# Altium PCB VINYL-Player(1).PcbDoc
Units mm, origin at the board's own origin, x right, y up, seen from the top; angles counter-clockwise.
Board outline 152.4 x 101.6 mm, 18 copper layers (F.Cu, F.Mask, B.Cu, B.Mask, F.SilkS, B.SilkS, F.Adhes, B.Adhes, F.Paste, B.Paste, Dwgs.User, Cmts.User, Eco1.User, Eco2.User, Edge.Cuts, Margin, B.CrtYd, F.CrtYd); 26 components, 0 nets, 136 pads, 10 vias.
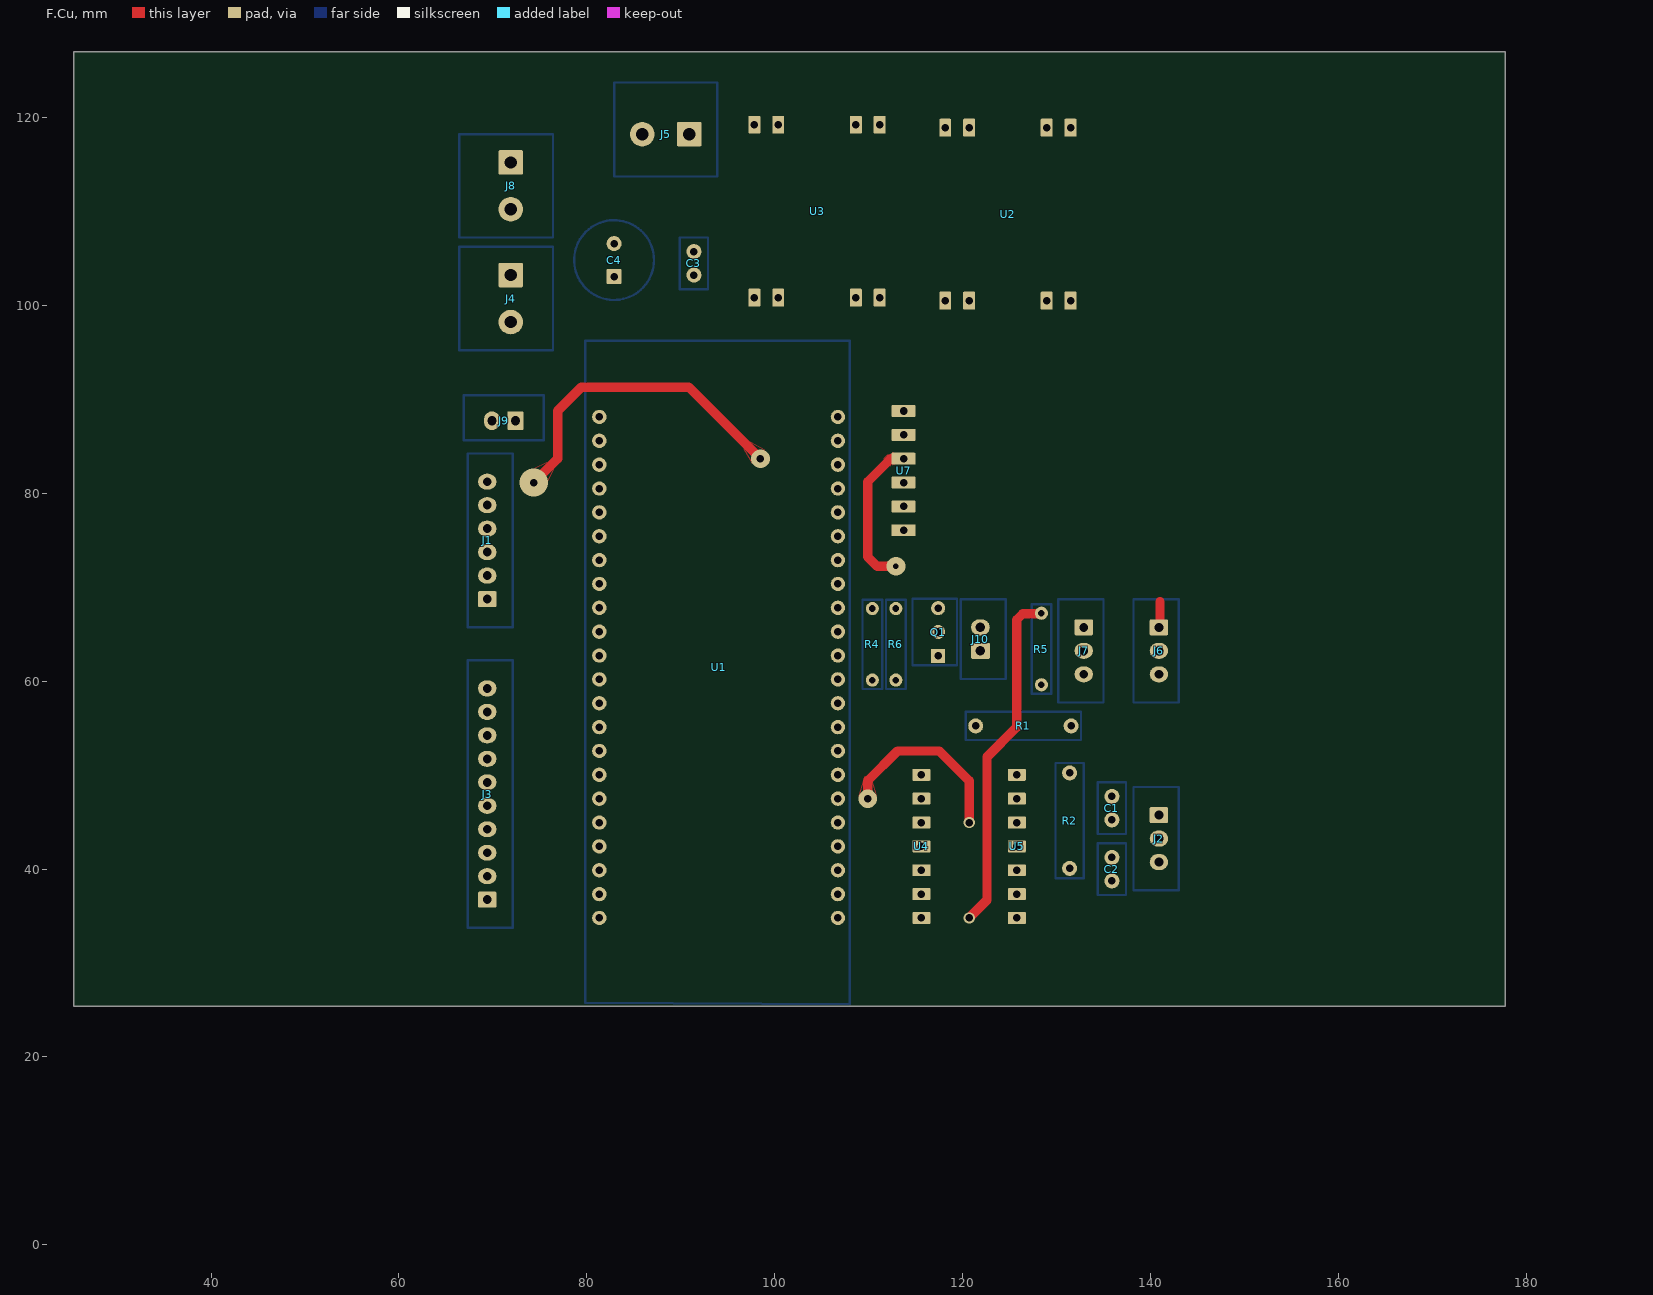
[diagram p0: F.Cu view]
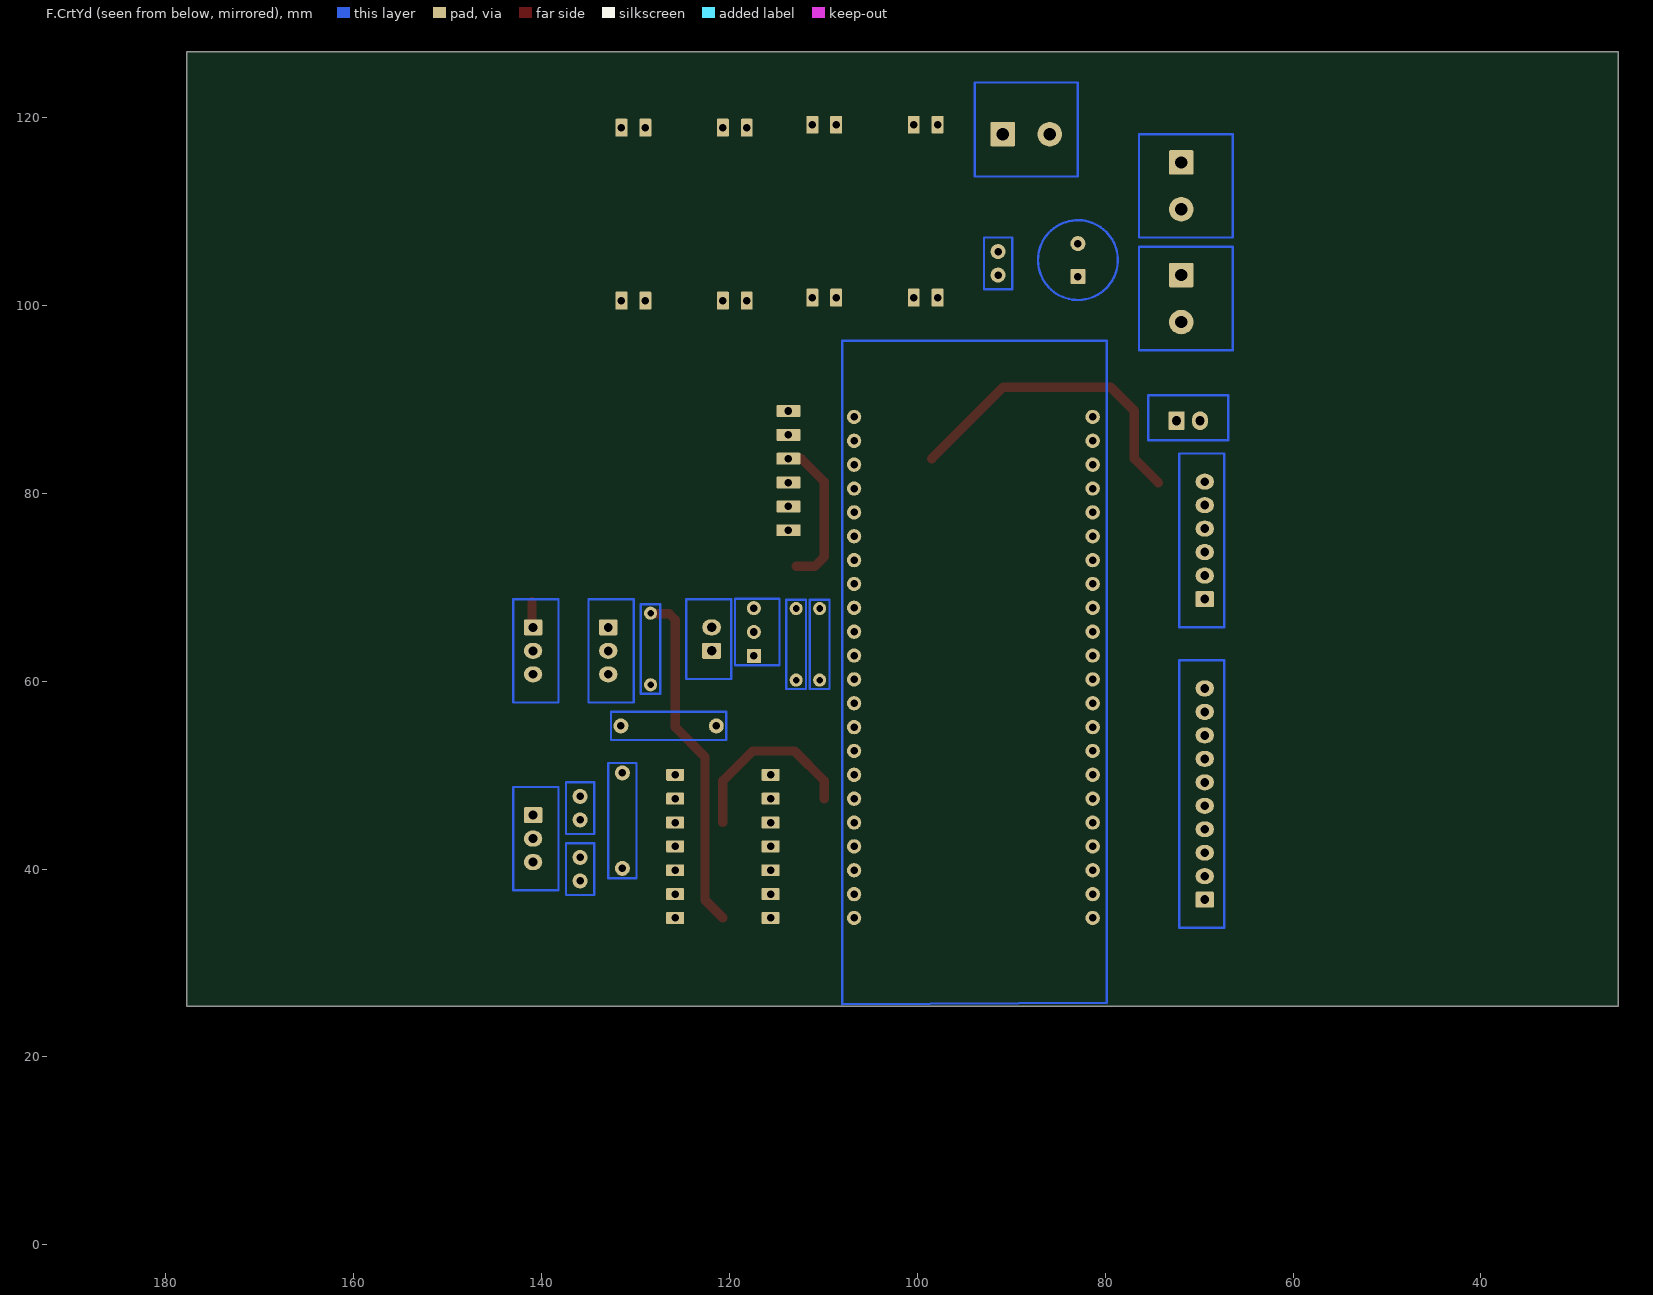
[diagram p1: F.CrtYd view, seen from below]
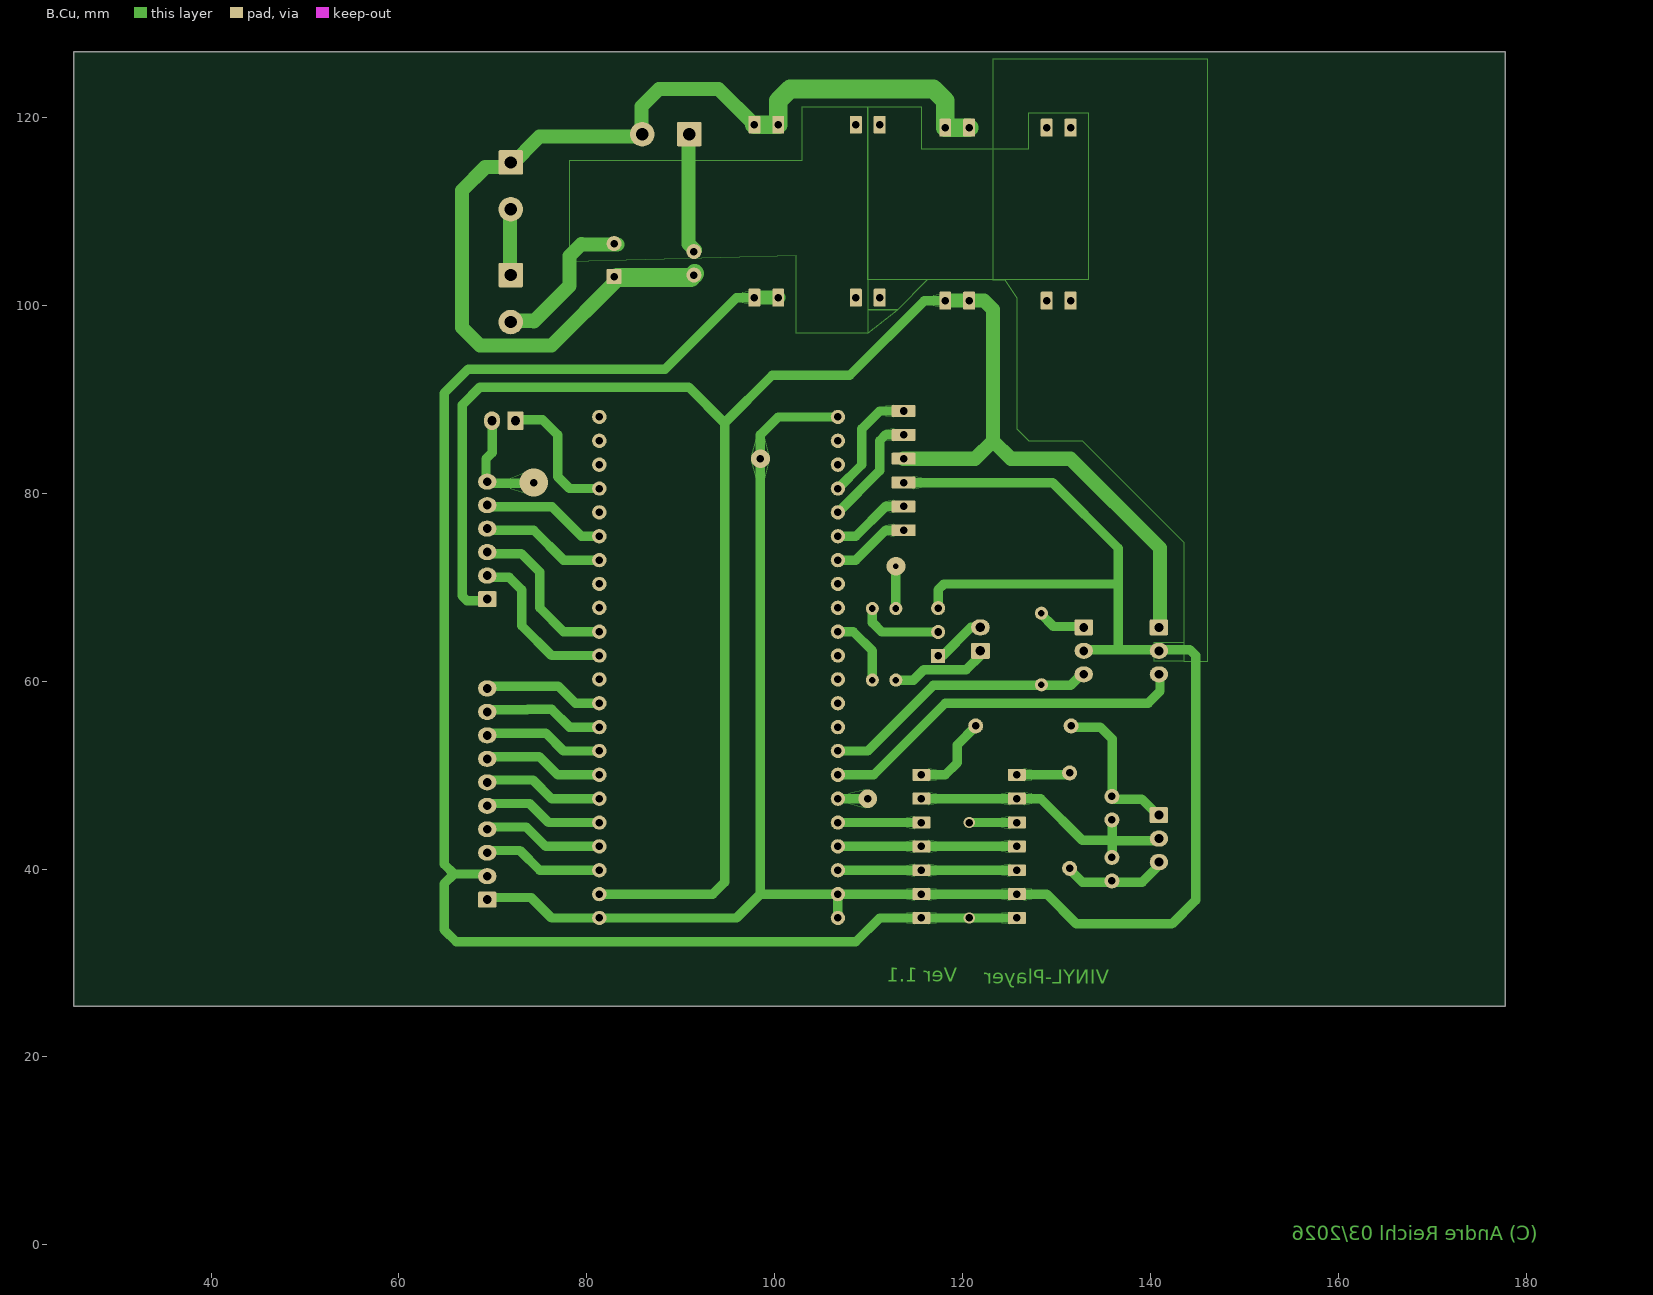
[diagram p2: B.Cu]
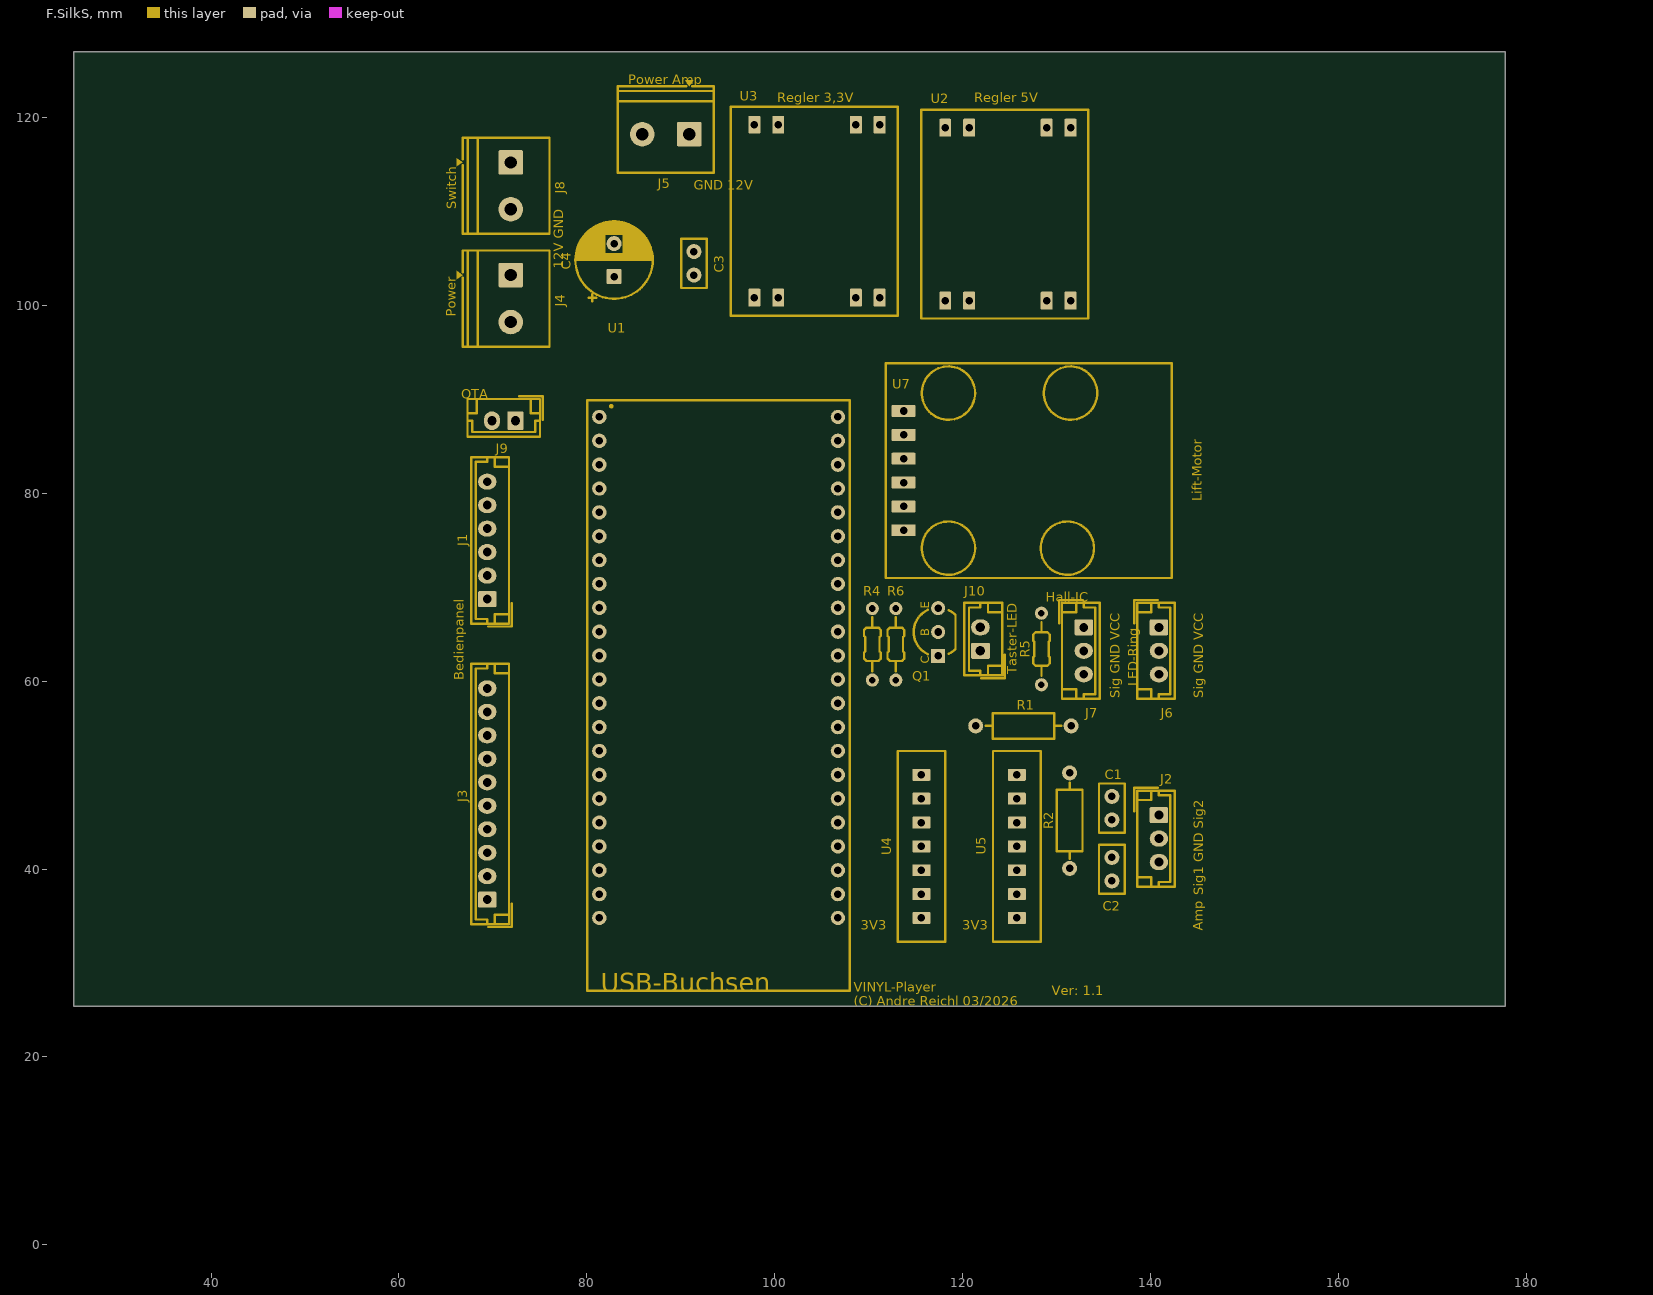
[diagram p3: F.SilkS]
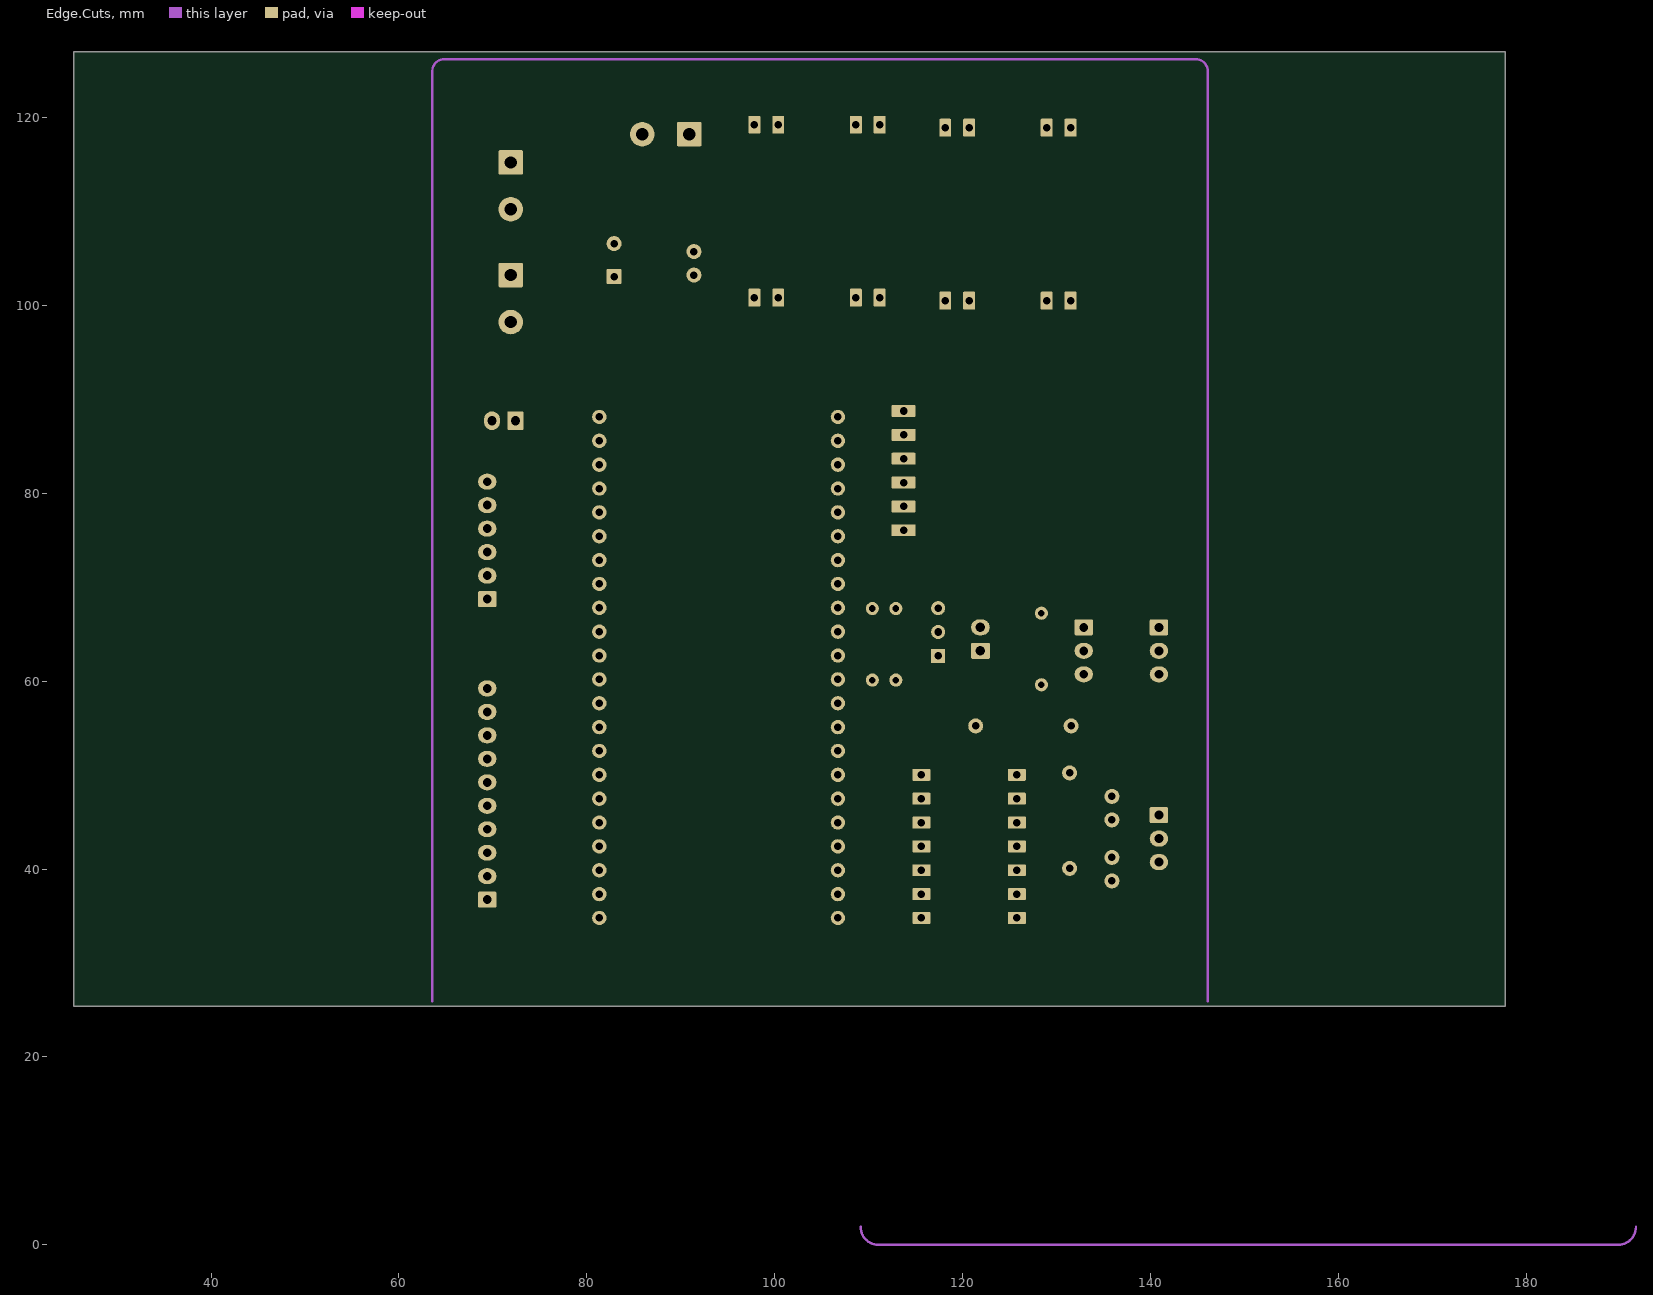
[diagram p4: Edge.Cuts]

## Layer stack, top to bottom
Top Solder: solder mask 0.0102, Solder Resist, Dk 3.5
F.Cu: signal copper 0.0356
Dielectric 1: dielectric 0.32, FR-4, Dk 4.8
F.Mask: signal copper 0.0356
Dielectric2: dielectric 0.32, FR-4, Dk 4.8
B.Cu: signal copper 0.0356
Dielectric3: dielectric 0.32, FR-4, Dk 4.8
B.Mask: signal copper 0.0356
Dielectric4: dielectric 0.32, FR-4, Dk 4.8
F.SilkS: signal copper 0.0356
Dielectric5: dielectric 0.32, FR-4, Dk 4.8
B.SilkS: signal copper 0.0356
Dielectric6: dielectric 0.32, FR-4, Dk 4.8
F.Adhes: signal copper 0.0356
Dielectric7: dielectric 0.32, FR-4, Dk 4.8
B.Adhes: signal copper 0.0356
Dielectric8: dielectric 0.32, FR-4, Dk 4.8
F.Paste: signal copper 0.0356
Dielectric9: dielectric 0.32, FR-4, Dk 4.8
B.Paste: signal copper 0.0356
Dielectric10: dielectric 0.32, FR-4, Dk 4.8
Dwgs.User: signal copper 0.0356
Dielectric11: dielectric 0.32, FR-4, Dk 4.8
Cmts.User: signal copper 0.0356
Dielectric12: dielectric 0.32, FR-4, Dk 4.8
Eco1.User: signal copper 0.0356
Dielectric13: dielectric 0.32, FR-4, Dk 4.8
Eco2.User: signal copper 0.0356
Dielectric14: dielectric 0.32, FR-4, Dk 4.8
Edge.Cuts: signal copper 0.0356
Dielectric15: dielectric 0.32, FR-4, Dk 4.8
Margin: signal copper 0.0356
Dielectric16: dielectric 0.32, FR-4, Dk 4.8
B.CrtYd: signal copper 0.0356
Dielectric17: dielectric 0.32, FR-4, Dk 4.8
F.CrtYd: signal copper 0.0356
Bottom Solder: solder mask 0.0102, Solder Resist, Dk 3.5

## Board outline
25.4,25.4 177.8,25.4 177.8,127 25.4,127

## Design rules (kind name [scope] priority, off if disabled: settings)
Clearance "Clearence 0,2_NetClass" [InNetClass('Default')] p1: gap=0.2 ignorepadtopadclearanceinfootprint=FALSE
Clearance "Clearence 0,1_Polygon" [InNamedPolygon('B.Cu--4') OR InNamedPolygon('B.Cu--5') OR InNamedPolygon('B.Cu--12') OR InNamedPolygon('B.Cu--20') OR InNamedPolygon('B.Cu--30') OR InNamedPolygon('B.Cu--32')] p2: gap=0.1 ignorepadtopadclearanceinfootprint=FALSE
MinimumSolderMaskSliver [All] p1: minsoldermaskwidth=0
PolygonConnect Polygon_B.Cu--36_ConnectDirect [IsNamedPolygon('B.Cu--36')] p1: connectstyle=Direct reliefconductorwidth=0.254 reliefentries=4 polygonreliefangle="90 Angle" airgapwidth=0.254
PolygonConnect Polygon_B.Cu--35_ConnectDirect [IsNamedPolygon('B.Cu--35')] p2: connectstyle=Direct reliefconductorwidth=0.254 reliefentries=4 polygonreliefangle="90 Angle" airgapwidth=0.254
PolygonConnect Polygon_B.Cu--34_ConnectDirect [IsNamedPolygon('B.Cu--34')] p3: connectstyle=Direct reliefconductorwidth=0.254 reliefentries=4 polygonreliefangle="90 Angle" airgapwidth=0.254
PolygonConnect Polygon_B.Cu--33_ConnectDirect [IsNamedPolygon('B.Cu--33')] p4: connectstyle=Direct reliefconductorwidth=0.254 reliefentries=4 polygonreliefangle="90 Angle" airgapwidth=0.254
PolygonConnect Polygon_B.Cu--32_ConnectDirect [IsNamedPolygon('B.Cu--32') vs IsVia] p5: connectstyle=Direct reliefconductorwidth=0.254 reliefentries=4 polygonreliefangle="90 Angle" airgapwidth=0.254
PolygonConnect Polygon_B.Cu--32_ConnectRelief45 [IsNamedPolygon('B.Cu--32') vs (IsThruPin or IsSMTPin) and (PadShape_AllLayers = 'Round')] p6: connectstyle=Relief reliefconductorwidth=0.5 reliefentries=4 polygonreliefangle="45 Angle" airgapwidth=0.5
PolygonConnect Polygon_B.Cu--32_ConnectRelief90 [IsNamedPolygon('B.Cu--32') vs (IsThruPin or IsSMTPin) and (PadShape_AllLayers <> 'Round')] p7: connectstyle=Relief reliefconductorwidth=0.5 reliefentries=4 polygonreliefangle="90 Angle" airgapwidth=0.5
PolygonConnect Polygon_B.Cu--31_ConnectDirect [IsNamedPolygon('B.Cu--31')] p8: connectstyle=Direct reliefconductorwidth=0.254 reliefentries=4 polygonreliefangle="90 Angle" airgapwidth=0.254
PolygonConnect Polygon_B.Cu--30_ConnectDirect [IsNamedPolygon('B.Cu--30') vs IsVia] p9: connectstyle=Direct reliefconductorwidth=0.254 reliefentries=4 polygonreliefangle="90 Angle" airgapwidth=0.254
PolygonConnect Polygon_B.Cu--30_ConnectRelief45 [IsNamedPolygon('B.Cu--30') vs (IsThruPin or IsSMTPin) and (PadShape_AllLayers = 'Round')] p10: connectstyle=Relief reliefconductorwidth=0.5 reliefentries=4 polygonreliefangle="45 Angle" airgapwidth=0.5
PolygonConnect Polygon_B.Cu--30_ConnectRelief90 [IsNamedPolygon('B.Cu--30') vs (IsThruPin or IsSMTPin) and (PadShape_AllLayers <> 'Round')] p11: connectstyle=Relief reliefconductorwidth=0.5 reliefentries=4 polygonreliefangle="90 Angle" airgapwidth=0.5
PolygonConnect Polygon_B.Cu--29_ConnectDirect [IsNamedPolygon('B.Cu--29')] p12: connectstyle=Direct reliefconductorwidth=0.254 reliefentries=4 polygonreliefangle="90 Angle" airgapwidth=0.254
PolygonConnect Polygon_B.Cu--28_ConnectDirect [IsNamedPolygon('B.Cu--28')] p13: connectstyle=Direct reliefconductorwidth=0.254 reliefentries=4 polygonreliefangle="90 Angle" airgapwidth=0.254
PolygonConnect Polygon_B.Cu--27_ConnectDirect [IsNamedPolygon('B.Cu--27')] p14: connectstyle=Direct reliefconductorwidth=0.254 reliefentries=4 polygonreliefangle="90 Angle" airgapwidth=0.254
PolygonConnect Polygon_B.Cu--26_ConnectDirect [IsNamedPolygon('B.Cu--26')] p15: connectstyle=Direct reliefconductorwidth=0.254 reliefentries=4 polygonreliefangle="90 Angle" airgapwidth=0.254
PolygonConnect Polygon_B.Cu--25_ConnectDirect [IsNamedPolygon('B.Cu--25')] p16: connectstyle=Direct reliefconductorwidth=0.254 reliefentries=4 polygonreliefangle="90 Angle" airgapwidth=0.254
PolygonConnect Polygon_B.Cu--24_ConnectDirect [IsNamedPolygon('B.Cu--24')] p17: connectstyle=Direct reliefconductorwidth=0.254 reliefentries=4 polygonreliefangle="90 Angle" airgapwidth=0.254
PolygonConnect Polygon_B.Cu--23_ConnectDirect [IsNamedPolygon('B.Cu--23')] p18: connectstyle=Direct reliefconductorwidth=0.254 reliefentries=4 polygonreliefangle="90 Angle" airgapwidth=0.254
PolygonConnect Polygon_B.Cu--22_ConnectDirect [IsNamedPolygon('B.Cu--22')] p19: connectstyle=Direct reliefconductorwidth=0.254 reliefentries=4 polygonreliefangle="90 Angle" airgapwidth=0.254
PolygonConnect Polygon_B.Cu--21_ConnectDirect [IsNamedPolygon('B.Cu--21')] p20: connectstyle=Direct reliefconductorwidth=0.254 reliefentries=4 polygonreliefangle="90 Angle" airgapwidth=0.254
PolygonConnect Polygon_B.Cu--20_ConnectDirect [IsNamedPolygon('B.Cu--20') vs IsVia] p21: connectstyle=Direct reliefconductorwidth=0.254 reliefentries=4 polygonreliefangle="90 Angle" airgapwidth=0.254
PolygonConnect Polygon_B.Cu--20_ConnectRelief45 [IsNamedPolygon('B.Cu--20') vs (IsThruPin or IsSMTPin) and (PadShape_AllLayers = 'Round')] p22: connectstyle=Relief reliefconductorwidth=0.5 reliefentries=4 polygonreliefangle="45 Angle" airgapwidth=0.5
PolygonConnect Polygon_B.Cu--20_ConnectRelief90 [IsNamedPolygon('B.Cu--20') vs (IsThruPin or IsSMTPin) and (PadShape_AllLayers <> 'Round')] p23: connectstyle=Relief reliefconductorwidth=0.5 reliefentries=4 polygonreliefangle="90 Angle" airgapwidth=0.5
PolygonConnect Polygon_B.Cu--19_ConnectDirect [IsNamedPolygon('B.Cu--19')] p24: connectstyle=Direct reliefconductorwidth=0.254 reliefentries=4 polygonreliefangle="90 Angle" airgapwidth=0.254
PolygonConnect Polygon_B.Cu--18_ConnectDirect [IsNamedPolygon('B.Cu--18')] p25: connectstyle=Direct reliefconductorwidth=0.254 reliefentries=4 polygonreliefangle="90 Angle" airgapwidth=0.254
PolygonConnect Polygon_B.Cu--17_ConnectDirect [IsNamedPolygon('B.Cu--17')] p26: connectstyle=Direct reliefconductorwidth=0.254 reliefentries=4 polygonreliefangle="90 Angle" airgapwidth=0.254
PolygonConnect Polygon_B.Cu--16_ConnectDirect [IsNamedPolygon('B.Cu--16')] p27: connectstyle=Direct reliefconductorwidth=0.254 reliefentries=4 polygonreliefangle="90 Angle" airgapwidth=0.254
PolygonConnect Polygon_B.Cu--15_ConnectDirect [IsNamedPolygon('B.Cu--15')] p28: connectstyle=Direct reliefconductorwidth=0.254 reliefentries=4 polygonreliefangle="90 Angle" airgapwidth=0.254
PolygonConnect Polygon_B.Cu--14_ConnectDirect [IsNamedPolygon('B.Cu--14')] p29: connectstyle=Direct reliefconductorwidth=0.254 reliefentries=4 polygonreliefangle="90 Angle" airgapwidth=0.254
PolygonConnect Polygon_B.Cu--13_ConnectDirect [IsNamedPolygon('B.Cu--13')] p30: connectstyle=Direct reliefconductorwidth=0.254 reliefentries=4 polygonreliefangle="90 Angle" airgapwidth=0.254
PolygonConnect Polygon_B.Cu--12_ConnectDirect [IsNamedPolygon('B.Cu--12')] p31: connectstyle=Direct reliefconductorwidth=0.254 reliefentries=4 polygonreliefangle="90 Angle" airgapwidth=0.254
PolygonConnect Polygon_B.Cu--11_ConnectDirect [IsNamedPolygon('B.Cu--11')] p32: connectstyle=Direct reliefconductorwidth=0.254 reliefentries=4 polygonreliefangle="90 Angle" airgapwidth=0.254
PolygonConnect Polygon_B.Cu--10_ConnectDirect [IsNamedPolygon('B.Cu--10')] p33: connectstyle=Direct reliefconductorwidth=0.254 reliefentries=4 polygonreliefangle="90 Angle" airgapwidth=0.254
PolygonConnect Polygon_B.Cu--9_ConnectDirect [IsNamedPolygon('B.Cu--9')] p34: connectstyle=Direct reliefconductorwidth=0.254 reliefentries=4 polygonreliefangle="90 Angle" airgapwidth=0.254
PolygonConnect Polygon_B.Cu--8_ConnectDirect [IsNamedPolygon('B.Cu--8')] p35: connectstyle=Direct reliefconductorwidth=0.254 reliefentries=4 polygonreliefangle="90 Angle" airgapwidth=0.254
PolygonConnect Polygon_B.Cu--7_ConnectDirect [IsNamedPolygon('B.Cu--7')] p36: connectstyle=Direct reliefconductorwidth=0.254 reliefentries=4 polygonreliefangle="90 Angle" airgapwidth=0.254
PolygonConnect Polygon_B.Cu--6_ConnectDirect [IsNamedPolygon('B.Cu--6')] p37: connectstyle=Direct reliefconductorwidth=0.254 reliefentries=4 polygonreliefangle="90 Angle" airgapwidth=0.254
PolygonConnect Polygon_B.Cu--5_ConnectDirect [IsNamedPolygon('B.Cu--5')] p38: connectstyle=Direct reliefconductorwidth=0.254 reliefentries=4 polygonreliefangle="90 Angle" airgapwidth=0.254
PolygonConnect Polygon_B.Cu--4_ConnectDirect [IsNamedPolygon('B.Cu--4') vs IsVia] p39: connectstyle=Direct reliefconductorwidth=0.254 reliefentries=4 polygonreliefangle="90 Angle" airgapwidth=0.254
PolygonConnect Polygon_B.Cu--4_ConnectRelief45 [IsNamedPolygon('B.Cu--4') vs (IsThruPin or IsSMTPin) and (PadShape_AllLayers = 'Round')] p40: connectstyle=Relief reliefconductorwidth=0.5 reliefentries=4 polygonreliefangle="45 Angle" airgapwidth=0.5
PolygonConnect Polygon_B.Cu--4_ConnectRelief90 [IsNamedPolygon('B.Cu--4') vs (IsThruPin or IsSMTPin) and (PadShape_AllLayers <> 'Round')] p41: connectstyle=Relief reliefconductorwidth=0.5 reliefentries=4 polygonreliefangle="90 Angle" airgapwidth=0.5
PolygonConnect Polygon_B.Cu--3_ConnectDirect [IsNamedPolygon('B.Cu--3')] p42: connectstyle=Direct reliefconductorwidth=0.254 reliefentries=4 polygonreliefangle="90 Angle" airgapwidth=0.254
PolygonConnect Polygon_B.Cu--2_ConnectDirect [IsNamedPolygon('B.Cu--2')] p43: connectstyle=Direct reliefconductorwidth=0.254 reliefentries=4 polygonreliefangle="90 Angle" airgapwidth=0.254
PolygonConnect Polygon_B.Cu--1_ConnectDirect [IsNamedPolygon('B.Cu--1')] p44: connectstyle=Direct reliefconductorwidth=0.254 reliefentries=4 polygonreliefangle="90 Angle" airgapwidth=0.254
PolygonConnect Polygon_B.Cu-_ConnectDirect [IsNamedPolygon('B.Cu-')] p45: connectstyle=Direct reliefconductorwidth=0.254 reliefentries=4 polygonreliefangle="90 Angle" airgapwidth=0.254
PolygonConnect Polygon_F.Cu--3_ConnectDirect [IsNamedPolygon('F.Cu--3')] p46: connectstyle=Direct reliefconductorwidth=0.254 reliefentries=4 polygonreliefangle="90 Angle" airgapwidth=0.254
PolygonConnect Polygon_F.Cu--2_ConnectDirect [IsNamedPolygon('F.Cu--2')] p47: connectstyle=Direct reliefconductorwidth=0.254 reliefentries=4 polygonreliefangle="90 Angle" airgapwidth=0.254
PolygonConnect Polygon_F.Cu--1_ConnectDirect [IsNamedPolygon('F.Cu--1')] p48: connectstyle=Direct reliefconductorwidth=0.254 reliefentries=4 polygonreliefangle="90 Angle" airgapwidth=0.254
PolygonConnect Polygon_F.Cu-_ConnectDirect [IsNamedPolygon('F.Cu-')] p49: connectstyle=Direct reliefconductorwidth=0.254 reliefentries=4 polygonreliefangle="90 Angle" airgapwidth=0.254
RoutingVias [All] p1: holewidth=0.711 width=1.27 viastyle="Through Hole" minholewidth=0.711 minwidth=1.27 maxholewidth=0.711 maxwidth=1.27
SilkToSilkClearance [All] p1: silktosilkclearance=0
SilkToSolderMaskClearance [IsPad] p1: minsilkscreentomaskgap=0 clearancetoexposedcopper=TRUE
SolderMaskExpansion [All] p1: expansion=0 istentingtop=FALSE
Width [All] p1: maxlimit=10 minlimit=0.254 preferedwidth=0.254 toplayer_prefwidth=0.2 midlayer1_maxwidth=0.254 midlayer2_prefwidth=0.2 midlayer3_maxwidth=0.254 midlayer5_prefwidth=0.2 midlayer7_maxwidth=0.254 midlayer9_maxwidth=0.254 midlayer11_maxwidth=0.254 midlayer13_maxwidth=0.254 midlayer15_maxwidth=0.254 midlayer17_maxwidth=0.254 midlayer19_maxwidth=0.254 midlayer21_maxwidth=0.254 midlayer23_maxwidth=0.254 midlayer25_prefwidth=0.2 midlayer27_maxwidth=0.254 midlayer29_maxwidth=0.254 bottomlayer_prefwidth=0.2 minimp=50.000000 maximp=50.000000 favimp=50.000000
27 further rules are at their usual default settings.

## Components (designator, comment, footprint, x,y, rotation, side; value= is the part's Value field where it differs from the comment)
C1 "Comment" C_Disc_D5.0mm_W2.5mm_P2.50mm 135.907,45.243 r90 top value=100nF
C2 "Comment" C_Disc_D5.0mm_W2.5mm_P2.50mm 135.907,41.243 r270 top value=100nF
C3 "Comment" C_Disc_D5.0mm_W2.5mm_P2.50mm 91.407,105.743 r270 top value=100nF
C4 "Comment" CP_Radial_D8.0mm_P3.50mm 82.907,103.09 r90 top value=470uF_16V
J1 "Comment" JST_EH_B6B-EH-A_1x06_P2.50mm_Vertical 69.407,68.743 r90 top value=JST_06
J2 "Comment" JST_EH_B3B-EH-A_1x03_P2.50mm_Vertical 140.907,45.743 r270 top value=JST_03
J3 "Comment" JST_EH_B10B-EH-A_1x10_P2.50mm_Vertical 69.407,36.743 r90 top value=JST_10
J4 "Comment" TerminalBlock_Phoenix_PT-1,5-2-5.0-H_1x02_P5.00mm_Horizontal 71.907,103.243 r270 top value=Screw_Terminal_2_P5.00mm
J5 "Comment" TerminalBlock_Phoenix_PT-1,5-2-5.0-H_1x02_P5.00mm_Horizontal 90.907,118.243 r180 top value=Screw_Terminal_2_P5.00mm
J6 "Comment" JST_EH_B3B-EH-A_1x03_P2.50mm_Vertical 140.907,65.743 r270 top value=JST_03
J7 "Comment" JST_EH_B3B-EH-A_1x03_P2.50mm_Vertical 132.907,65.743 r270 top value=JST_03
J8 "Comment" TerminalBlock_Phoenix_PT-1,5-2-5.0-H_1x02_P5.00mm_Horizontal 71.907,115.243 r270 top value=Screw_Terminal_2_P5.00mm
J9 "Comment" JST_EH_B2B-EH-A_1x02_P2.50mm_Vertical 72.407,87.743 r180 top value=JST_02
J10 "Comment" JST_EH_B2B-EH-A_1x02_P2.50mm_Vertical 121.907,63.243 r90 top value=JST_02
Q1 "Comment" TO-92_Inline_Wide_CBE 117.407,62.703 r90 top value=BC547C
R1 "Comment" R_Axial_DIN0207_L6.3mm_D2.5mm_P10.16mm_Horizontal 121.407,55.243 r0 top value=4.7k
R2 "Comment" R_Axial_DIN0207_L6.3mm_D2.5mm_P10.16mm_Horizontal 131.407,40.083 r90 top value=4.7k
R4 "Comment" R_Axial_DIN0204_L3.6mm_D1.6mm_P7.62mm_Horizontal 110.407,60.123 r90 top value=1k
R5 "Comment" R_Axial_DIN0204_L3.6mm_D1.6mm_P7.62mm_Horizontal 128.407,59.623 r90 top value=1k
R6 "Comment" R_Axial_DIN0204_L3.6mm_D1.6mm_P7.62mm_Horizontal 112.907,67.743 r270 top value=1k
U1 "Comment" XCVR_ESP32-S3-DEVKITC-1-N8R2 92.767,58.168 r0 top value=ESP32-S3-DEVKITC-1-N8R2
U2 "Comment" MP1584-PowerDown-Modul 128.327,106.87 r0 top value=MP1584
U3 "Comment" MP1584-PowerDown-Modul 108.007,107.188 r0 top value=MP1584
U4 "Comment" AD9833-Modul-Hochkant 109.277,42.418 r90 top value=AD9833
U5 "Comment" AD9833-Modul-Hochkant 119.437,42.418 r90 top value=AD9833
U7 "Comment" L9110_Dual_Motor_Module 113.722,84.963 r0 top value=L9110_Dual_Motor_Module

## Footprints (in the part's own frame and the unit in brackets; to place one, negate y for a bottom-side part, rotate by r counter-clockwise, add the part's x,y. Pads: shape width x height; smd on the part's side, far side on the other; paste and mask are expansions set on the pad)
AD9833-Modul-Hochkant [mm]
  rrect15% 1.27x1.905 hole 0.8 paste-2539.97 mask-1.905: 1(-7.62,-6.35) 2(-5.08,-6.35) 3(-2.54,-6.35) 4(0,-6.35) 5(2.54,-6.35) 6(5.08,-6.35) 7(7.62,-6.35)
  F.SilkS lines w0.254: -10.16,-3.81 10.16,-3.81 10.16,-8.89 -10.16,-8.89 -10.16,-3.81
C_Disc_D5.0mm_W2.5mm_P2.50mm [mm]
  round 1.6 hole 0.8 paste-2539.97 mask-1.6: 1(0,0) 2(2.5,0)
  F.SilkS lines w0.254: -1.37,1.37 -1.37,-1.37 3.87,-1.37 3.87,1.37 -1.37,1.37
  F.CrtYd lines w0.254: -1.5,1.5 4,1.5 4,-1.5 -1.5,-1.5 -1.5,1.5
CP_Radial_D8.0mm_P3.50mm [mm]
  rrect16% 1.6x1.6 hole 0.8 paste-2539.97 mask-1.6: 1(0,0)
  round 1.6 hole 0.8 paste-2539.97 mask-1.6: 2(3.5,0)
  F.SilkS circle w0.254: c1.75,0 r4.12
  F.SilkS lines w0.254: -2.26,2.715 -2.26,1.915 ; -2.66,2.315 -1.86,2.315 ; 5.55,1.552 5.55,-1.552 ; 5.59,1.453 5.59,-1.453 ; 5.63,1.346 5.63,-1.346 ; 5.67,1.228 5.67,-1.228 ; 5.71,1.097 5.71,-1.097 ; 5.75,0.947 5.75,-0.947 ; 5.79,0.768 5.79,-0.768 ; 5.83,0.533 5.83,-0.533 ; 2.47,-1.04 2.47,-4.017 ; 5.51,-1.644 5.47,1.731 5.43,-1.813 5.39,1.89 5.35,-1.964 5.31,2.034 5.27,-2.101 5.23,2.165 5.19,-2.227 5.15,2.287 5.11,-2.344 5.07,2.4 5.03,-2.453 4.99,2.505 4.95,-2.555 4.91,2.604 4.87,-2.651 4.83,2.696 4.79,-2.741 4.75,2.784 4.71,-2.826 4.67,2.867 4.63,-2.906 4.59,2.945 4.55,-2.982 4.51,3.019 4.47,1.04 4.43,3.089 4.39,1.04 4.35,3.156 4.31,1.04 4.27,3.219 4.23,1.04 4.19,3.28 4.15,1.04 4.11,3.337 4.07,1.04 4.03,3.392 3.99,1.04 3.95,3.443 3.91,1.04 3.87,3.493 3.83,1.04 3.79,3.539 3.75,1.04 3.71,3.584 3.67,1.04 3.63,3.626 3.59,1.04 3.55,3.666 3.51,1.04 3.47,3.704 3.43,1.04 3.39,3.74 3.35,1.04 3.31,3.773 3.27,1.04 3.23,3.805 3.19,1.04 3.15,3.835 3.11,1.04 3.07,3.863 3.03,1.04 2.99,3.889 2.95,1.04 2.91,3.913 2.87,1.04 2.83,3.936 2.79,1.04 2.75,3.957 2.71,1.04 2.67,3.976 2.63,1.04 2.59,3.993 2.55,1.04 2.47,4.017 ; 1.79,4.08 1.83,-4.079 ; 1.79,4.08 1.79,-4.08 1.79,4.08 ; 1.79,4.08 1.83,-4.079 ; 2.47,4.017 2.47,1.04 2.47,4.017 ; 4.51,-1.04 4.51,-3.019 4.51,-1.04 ; 4.51,-1.04 4.43,-3.089 4.39,-1.04 4.35,-3.156 4.31,-1.04 4.27,-3.219 4.23,-1.04 4.19,-3.28 4.15,-1.04 4.11,-3.337 4.07,-1.04 4.03,-3.392 3.99,-1.04 3.95,-3.443 3.91,-1.04 3.87,-3.493 3.83,-1.04 3.79,-3.539 3.75,-1.04 3.71,-3.584 3.67,-1.04 3.63,-3.626 3.59,-1.04 3.55,-3.666 3.51,-1.04 3.47,-3.704 3.43,-1.04 3.39,-3.74 3.35,-1.04 3.31,-3.773 3.27,-1.04 3.23,-3.805 3.19,-1.04 3.15,-3.835 3.11,-1.04 3.07,-3.863 3.03,-1.04 2.99,-3.889 2.95,-1.04 2.91,-3.913 2.87,-1.04 2.83,-3.936 2.79,-1.04 2.75,-3.957 2.71,-1.04 2.67,-3.976 2.63,-1.04 2.59,-3.993 2.55,-1.04 2.43,-4.023 2.39,4.03 2.35,-4.036 2.31,4.042 2.27,-4.047 2.23,4.052 2.19,-4.056 2.15,4.061 2.11,-4.064 2.07,4.068 2.03,-4.07 1.99,4.073 1.95,-4.075 1.91,4.077 1.83,-4.079
  F.CrtYd circle w0.254: c1.75,0 r4.25
JST_EH_B2B-EH-A_1x02_P2.50mm_Vertical [mm]
  rrect15% 1.7x2 hole 1 paste-2539.97 mask-2: 1(0,0)
  rrect100% 1.7x2 hole 1 paste-2539.97 mask-2: 2(2.5,0)
  F.SilkS lines w0.254: 5.11,0 4.61,0 4.61,1.21 -2.11,1.21 -2.11,0 -2.61,0 ; 5.11,-0.81 4.11,-0.81 4.11,-2.31 ; -0.41,-2.61 -2.91,-2.61 -2.91,-0.11 ; -1.61,-2.31 -1.61,-0.81 -2.61,-0.81 ; 5.11,1.71 -2.61,1.71 -2.61,-2.31 5.11,-2.31 5.11,1.71
  F.CrtYd lines w0.254: 5.5,2.1 -3,2.1 -3,-2.7 5.5,-2.7 5.5,2.1
JST_EH_B3B-EH-A_1x03_P2.50mm_Vertical [mm]
  rrect15% 1.7x1.95 hole 0.95 paste-2539.97 mask-1.95: 1(0,0)
  rrect100% 1.7x1.95 hole 0.95 paste-2539.97 mask-1.95: 2(2.5,0) 3(5,0)
  F.SilkS lines w0.254: -0.41,-2.61 -2.91,-2.61 -2.91,-0.11 ; 6.61,-2.31 6.61,-0.81 7.61,-0.81 ; -1.61,-2.31 -1.61,-0.81 -2.61,-0.81 ; 7.61,0 7.11,0 7.11,1.21 -2.11,1.21 -2.11,0 -2.61,0 ; 7.61,-2.31 7.61,1.71 -2.61,1.71 -2.61,-2.31 7.61,-2.31
  F.CrtYd lines w0.254: 8,-2.7 8,2.1 -3,2.1 -3,-2.7 8,-2.7
JST_EH_B6B-EH-A_1x06_P2.50mm_Vertical [mm]
  rrect15% 1.7x1.95 hole 0.95 paste-2539.97 mask-1.95: 1(0,0)
  rrect100% 1.7x1.95 hole 0.95 paste-2539.97 mask-1.95: 2(2.5,0) 3(5,0) 4(7.5,0) 5(10,0) 6(12.5,0)
  F.SilkS lines w0.254: -2.61,0 -2.11,0 -2.11,1.21 14.61,1.21 14.61,0 15.11,0 ; -2.91,-0.11 -2.91,-2.61 -0.41,-2.61 ; -2.61,-0.81 -1.61,-0.81 -1.61,-2.31 ; 15.11,-0.81 14.11,-0.81 14.11,-2.31 ; -2.61,1.71 15.11,1.71 15.11,-2.31 -2.61,-2.31 -2.61,1.71
  F.CrtYd lines w0.254: -3,2.1 15.5,2.1 15.5,-2.7 -3,-2.7 -3,2.1
JST_EH_B10B-EH-A_1x10_P2.50mm_Vertical [mm]
  rrect15% 1.7x1.95 hole 0.95 paste-2539.97 mask-1.95: 1(0,0)
  rrect100% 1.7x1.95 hole 0.95 paste-2539.97 mask-1.95: 2(2.5,0) 3(5,0) 4(7.5,0) 5(10,0) 6(12.5,0) 7(15,0) 8(17.5,0) 9(20,0) 10(22.5,0)
  F.SilkS lines w0.254: -2.61,0 -2.11,0 -2.11,1.21 24.61,1.21 24.61,0 25.11,0 ; -2.91,-0.11 -2.91,-2.61 -0.41,-2.61 ; -2.61,-0.81 -1.61,-0.81 -1.61,-2.31 ; 25.11,-0.81 24.11,-0.81 24.11,-2.31 ; -2.61,1.71 25.11,1.71 25.11,-2.31 -2.61,-2.31 -2.61,1.71
  F.CrtYd lines w0.254: -3,2.1 25.5,2.1 25.5,-2.7 -3,-2.7 -3,2.1
L9110_Dual_Motor_Module [mm]
  rrect15% 2.54x1.27 hole 0.8 paste-2539.97 mask-2.54: 1(0,3.81) 2(0,1.27) 3(0,-1.27) 4(0,-3.81) 5(0,-6.35) 6(0,-8.89)
  F.SilkS circle w0.254: c17.78,5.715 r2.84
  F.SilkS circle w0.254: c17.445,-10.795 r2.84
  F.SilkS circle w0.254: c4.78,-10.795 r2.84
  F.SilkS circle w0.254: c4.78,5.715 r2.84
  F.SilkS lines w0.254: -1.905,-13.97 28.575,-13.97 28.575,8.89 -1.905,8.89 -1.905,-13.97
MP1584-PowerDown-Modul [mm]
  rrect20% 1.27x1.905 hole 0.8 paste-2539.97 mask-1.905: 1(-10.16,12.065)
  rrect15% 1.27x1.905 hole 0.8 paste-2539.97 mask-1.905: 2(-7.62,12.065) 3(0.635,12.065) 4(3.175,12.065) 5(3.175,-6.35) 6(0.635,-6.35) 7(-7.62,-6.35) 8(-10.16,-6.35)
  F.SilkS lines w0.254: -12.7,-8.255 5.08,-8.255 5.08,13.97 -12.7,13.97 -12.7,-8.255
R_Axial_DIN0204_L3.6mm_D1.6mm_P7.62mm_Horizontal [mm]
  round 1.4 hole 0.7 paste-2539.97 mask-1.4: 1(0,0)
  rrect100% 1.4x1.4 hole 0.7 paste-2539.97 mask-1.4: 2(7.62,0)
  F.SilkS lines w0.254: 0.94,0 1.89,0 2.032,0 ; 5.588,0 5.73,0 6.68,0 ; 2.286,0.889 2.921,0.889 3.048,0.762 3.81,0.762 4.572,0.762 4.699,0.889 5.334,0.889 5.588,0.635 5.588,-0.635 5.334,-0.889 4.699,-0.889 4.572,-0.762 3.81,-0.762 3.048,-0.762 2.921,-0.889 2.286,-0.889 2.032,-0.635 2.032,0.635 2.286,0.889
  F.CrtYd lines w0.254: -0.95,1.05 -0.95,-1.05 8.57,-1.05 8.57,1.05 -0.95,1.05
R_Axial_DIN0207_L6.3mm_D2.5mm_P10.16mm_Horizontal [mm]
  round 1.6 hole 0.8 paste-2539.97 mask-1.6: 1(0,0) 2(10.16,0)
  F.SilkS lines w0.254: 1.04,0 1.81,0 ; 8.35,0 9.12,0 ; 1.81,-1.37 8.35,-1.37 8.35,1.37 1.81,1.37 1.81,-1.37
  F.CrtYd lines w0.254: -1.05,-1.5 11.21,-1.5 11.21,1.5 -1.05,1.5 -1.05,-1.5
TerminalBlock_Phoenix_PT-1,5-2-5.0-H_1x02_P5.00mm_Horizontal [mm]
  rrect10% 2.6x2.6 hole 1.3 paste-2539.97 mask-2.6: 1(0,0)
  round 2.6 hole 1.3 paste-2539.97 mask-2.6: 2(5,0)
  F.SilkS region: 0.44,-5.73 -0.44,-5.73 0,-5.12
  F.SilkS lines w0.254: 0.3,-5.12 7.62,-5.12 7.62,4.12 -2.62,4.12 -2.62,-5.12 -0.3,-5.12 ; 7.62,-4.6 -2.62,-4.6 ; 7.62,-3.5 -2.62,-3.5
  F.CrtYd lines w0.254: 8,-5.5 8,4.5 -3,4.5 -3,-5.5 8,-5.5
TO-92_Inline_Wide_CBE [mm]
  rect 1.5x1.5 hole 0.8 paste-2539.97 mask-1.5: 1(0,0)
  round 1.5 hole 0.8 paste-2539.97 mask-1.5: 2(2.54,0) 3(5.08,0)
  F.SilkS lines w0.254: 0.184,1.099 cw(c2.54,0) 2.54,2.6 cw(c2.54,0) 4.896,1.099 ; 0.216,-1.123 ccw(c2.54,0) 0.74,-1.85 4.34,-1.85 ccw(c2.54,0) 4.864,-1.123
  F.CrtYd lines w0.254: -1.01,2.73 6.09,2.73 6.09,-2.01 -1.01,-2.01 -1.01,2.73
XCVR_ESP32-S3-DEVKITC-1-N8R2 [mm]
  round 1.53 hole 0.8 paste-2539.97 mask-1.53: J1_1(-11.43,29.97) J1_2(-11.43,27.43) J1_3(-11.43,24.89) J1_4(-11.43,22.35) J1_5(-11.43,19.81) J1_6(-11.43,17.27) J1_7(-11.43,14.73) J1_8(-11.43,12.19) J1_9(-11.43,9.65) J1_10(-11.43,7.11) J1_11(-11.43,4.57) J1_12(-11.43,2.03) J1_13(-11.43,-0.51) J1_14(-11.43,-3.05) J1_15(-11.43,-5.59) J1_16(-11.43,-8.13) J1_17(-11.43,-10.67) J1_18(-11.43,-13.21) J1_19(-11.43,-15.75) J1_20(-11.43,-18.29) J1_21(-11.43,-20.83) J1_22(-11.43,-23.37) J3_1(13.97,29.97) J3_2(13.97,27.43) J3_3(13.97,24.89) J3_4(13.97,22.35) J3_5(13.97,19.81) J3_6(13.97,17.27) J3_7(13.97,14.73) J3_8(13.97,12.19) J3_9(13.97,9.65) J3_10(13.97,7.11) J3_11(13.97,4.57) J3_12(13.97,2.03) J3_13(13.97,-0.51) J3_14(13.97,-3.05) J3_15(13.97,-5.59) J3_16(13.97,-8.13) J3_17(13.97,-10.67) J3_18(13.97,-13.21) J3_19(13.97,-15.75) J3_20(13.97,-18.29) J3_21(13.97,-20.83) J3_22(13.97,-23.37)
  F.SilkS circle w0.254: c-10.16,31.115 r0.1
  F.SilkS lines w0.254: -12.7,-31.115 15.24,-31.115 15.24,31.75 -12.7,31.75 -12.7,-31.115
  F.CrtYd lines w0.254: 15.24,-32.56 -12.95,-32.385 -12.95,38.1 15.24,38.1 15.24,-32.385

## Part data
C1 C2 C3: library part C_Disc_D5.0mm_W2.5mm_P2.50mm, "C, Disc series, Radial, pin pitch=2.50mm, diameter*width=5*2.5mm^2, Capacitor, http://cdn-reichelt.de/documents/datenblatt/B300/DS_KERKO_TC.pdf", Description="100nF Ceramic Capacitor", KiLib_Generator=capacitor/THT/other
C4: library part CP_Radial_D8.0mm_P3.50mm, "CP, Radial series, Radial, pin pitch=3.50mm, diameter=8mm, height=12mm, Electrolytic Capacitor", Description="470uF, 16V Electrolytic Capacitor", KiLib_Generator=capacitor/THT/other, ki_fp_filters="Capacitor_THT:CP_Radial_D5.0mm_* Capacitor_THT:CP_Radial_D4.0mm_* Capacitor_THT:CP_Radial_D6.3mm_* Capacitor_THT:CP_Radial_D7.5mm_* Capacitor_THT:CP_Radial_D8.0mm_* Capacitor_THT:CP_Radial_D10.0mm_* Capacitor_THT:CP_Radial_D14.0mm_* Capacitor_THT:CP_Radial_D16.0mm_* Capacitor_THT:CP_Radial_D18.0mm_*"
J1: library part JST_EH_B6B-EH-A_1x06_P2.50mm_Vertical, "JST EH series connector, B6B-EH-A (http://www.jst-mfg.com/product/pdf/eng/eEH.pdf)", Description="JST Connector  6 pins", KiLib_Generator=connector/JST, ki_fp_filters=Connector_JST:JST_EH_S6B-EH_1x06_P2.50mm_Horizontal
J2 J6 J7: library part JST_EH_B3B-EH-A_1x03_P2.50mm_Vertical, "JST EH series connector, B3B-EH-A (http://www.jst-mfg.com/product/pdf/eng/eEH.pdf)", Description="JST Connector  3 pins", KiLib_Generator=connector/JST, ki_fp_filters=Connector_JST:JST_EH_S3B-EH_1x03_P2.50mm_Horizontal
J3: library part JST_EH_B10B-EH-A_1x10_P2.50mm_Vertical, "JST EH series connector, B10B-EH-A (http://www.jst-mfg.com/product/pdf/eng/eEH.pdf)", Description="JST Connector  10 pins", KiLib_Generator=connector/JST, ki_fp_filters=Connector_JST:JST_EH_S10B-EH_1x10_P2.50mm_Horizontal
J4 J5 J8: library part TerminalBlock_Phoenix_PT-1,5-2-5.0-H_1x02_P5.00mm_Horizontal, "Terminal Block Phoenix PT-1,5-2-5.0-H, 2 pins, pitch 5mm, size 10x9mm, drill diameter 1.3mm, pad diameter 2.6mm, http://www.mouser.com/ds/2/324/ItemDetail_1935161-922578.pdf", KiLib_Generator=terminal_block/Phoenix
J9 J10: library part JST_EH_B2B-EH-A_1x02_P2.50mm_Vertical, "JST EH series connector, B2B-EH-A (http://www.jst-mfg.com/product/pdf/eng/eEH.pdf)", Description="JST Connector  2 pins", KiLib_Generator=connector/JST, ki_fp_filters=Connector_JST:JST_EH_S2B-EH_1x02_P2.50mm_Horizontal
Q1: library part TO-92_Inline_Wide_CBE, "TO-92 leads in-line, wide, drill 0.75mm (see NXP sot054_po.pdf), Alternate KiCad Library", Datasheet=https://www.tme.eu/Document/6c5d898a533a0762c2bc33eb26c283a8/BC546-550-DTE.pdf, Description="NPN TO-92 transistor, 45V, 100mA, 500mW, Complementary to BC557, Alternate KiCAD Library"
R1 R2: library part R_Axial_DIN0207_L6.3mm_D2.5mm_P10.16mm_Horizontal, "Resistor, Axial_DIN0207 series, Axial, Horizontal, pin pitch=10.16mm, 0.25W = 1/4W, length*diameter=6.3*2.5mm^2, http://cdn-reichelt.de/documents/datenblatt/B400/1_4W%23YAG.pdf", Description="4.7kΩ, 1/4W Resistor", KiLib_Generator=resistor/THT, ki_fp_filters=Resistor_THT:R_Axial_DIN0207_L6.3mm_D2.5mm*
R4 R5 R6: library part R_Axial_DIN0204_L3.6mm_D1.6mm_P7.62mm_Horizontal, "Resistor, Axial_DIN0204 series, Axial, Horizontal, pin pitch=7.62mm, 0.167W, length*diameter=3.6*1.6mm^2, http://cdn-reichelt.de/documents/datenblatt/B400/1_4W%23YAG.pdf, Alternate KiCad Library", Description="THT 0204 Resistor, 7.62mm Pin Pitch, European Symbol, Alternate KiCad Library", ki_fp_filters=R_*
U1: library part XCVR_ESP32-S3-DEVKITC-1-N8R2, Package=None, MANUFACTURER=Espressif, MF="Espressif Systems", Description_1="WiFi Development Tools - 802.11 ESP32-S3 general-purpose development board, embeds ESP32-S3-WROOM-1-N8R2, with pin header", Price=None, Check_prices=https://www.snapeda.com/parts/ESP32-S3-DEVKITC-1-N8R2/Espressif+Systems/view-part/?ref=eda, STANDARD="Manufacturer Recommendations", PARTREV=V1, SnapEDA_Link=https://www.snapeda.com/parts/ESP32-S3-DEVKITC-1-N8R2/Espressif+Systems/view-part/?ref=snap, MP=ESP32-S3-DEVKITC-1-N8R2, Availability="In Stock"
U2 U3: library part MP1584-PowerDown-Modul
U4 U5: library part AD9833-Modul-Hochkant
U7: library part L9110_Dual_Motor_Module, "L9110_Dual_Motor_Module"

## Via types
v1: diameter 1.2, hole 0.8, F.Cu to B.Cu, tented both sides, 4 vias
v2: diameter 0.6, hole 0.3, F.Cu to B.Cu, tented both sides, 2 vias
v3: diameter 2, hole 0.8, F.Cu to B.Cu, tented both sides, 2 vias
v4: diameter 3, hole 0.8, F.Cu to B.Cu, tented both sides, 1 vias
v5: diameter 2, hole 0.6, F.Cu to B.Cu, tented both sides, 1 vias

## Nets (pads, with @x,y where several pads share a name; then routed paths per layer and width w, separated by ;. In a path a pad name is that pad's centre, name@x,y a point inside that pad or via, vN(x,y) a via of type N, cw(c..) or ccw(c..) an arc to the next point about the centre after c; other vN are vias at no path point)
pads on no net: C1.1 C1.2 C2.1 C2.2 C3.1 C3.2 C4.1 C4.2 J1.1 J1.2 J1.3 J1.4 J1.5 J1.6 J2.1 J2.2 J2.3 J3.1 J3.2 J3.3 J3.4 J3.5 J3.6 J3.7 J3.8 J3.9 J3.10 J4.1 J4.2 J5.1 J5.2 J6.1 J6.2 J6.3 J7.1 J7.2 J7.3 J8.1 J8.2 J9.1 J9.2 J10.1 J10.2 Q1.1 Q1.2 Q1.3 R1.1 R1.2 R2.1 R2.2 R4.1 R4.2 R5.1 R5.2 R6.1 R6.2 U1.J1_1 U1.J1_2 U1.J1_3 U1.J1_4 U1.J1_5 U1.J1_6 U1.J1_7 U1.J1_8 U1.J1_9 U1.J1_10 U1.J1_11 U1.J1_12 U1.J1_13 U1.J1_14 U1.J1_15 U1.J1_16 U1.J1_17 U1.J1_18 U1.J1_19 U1.J1_20 U1.J1_21 U1.J1_22 U1.J3_1 U1.J3_2 U1.J3_3 U1.J3_4 U1.J3_5 U1.J3_6 U1.J3_7 U1.J3_8 U1.J3_9 U1.J3_10 U1.J3_11 U1.J3_12 U1.J3_13 U1.J3_14 U1.J3_15 U1.J3_16 U1.J3_17 U1.J3_18 U1.J3_19 U1.J3_20 U1.J3_21 U1.J3_22 U2.1 U2.2 U2.3 U2.4 U2.5 U2.6 U2.7 U2.8 U3.1 U3.2 U3.3 U3.4 U3.5 U3.6 U3.7 U3.8 U4.1 U4.2 U4.3 U4.4 U4.5 U4.6 U4.7 U5.1 U5.2 U5.3 U5.4 U5.5 U5.6 U5.7 U7.1 U7.2 U7.3 U7.4 U7.5 U7.6
copper on no net: | length 1706.1
  F.Cu w1: v4(74.352,81.153) 76.892,83.693 76.892,88.773 79.432,91.313 90.862,91.313 v3(98.482,83.693) ; v3(109.912,47.498) 109.912,49.403 113.087,52.578 117.532,52.578 120.707,49.403 v1(120.707,44.958) ; v5(112.907,72.243) 110.907,72.243 109.907,73.243 109.907,81.243 112.357,83.693 113.722,83.693 ; v1(120.707,34.798) 122.612,36.703 122.612,51.943 125.787,55.118 125.787,66.548 126.422,67.183 128.327,67.183 ; 141.027,65.833 141.027,68.453
  B.Cu w1: 69.272,36.983 74.072,36.983 76.257,34.798 81.337,34.798 95.942,34.798 98.482,37.338 ; 69.272,39.483 65.857,39.483 ; 69.272,41.983 72.882,41.983 74.987,39.878 81.337,39.878 ; 69.272,44.483 73.557,44.483 75.622,42.418 81.337,42.418 ; 69.272,46.983 73.915,46.983 75.94,44.958 81.337,44.958 ; 69.272,49.483 74.272,49.483 76.257,47.498 81.337,47.498 ; 69.272,51.983 74.947,51.983 76.892,50.038 81.337,50.038 ; 69.272,54.483 75.622,54.483 77.527,52.578 81.337,52.578 ; 69.272,56.983 73.677,56.983 73.717,57.023 76.257,57.023 78.162,55.118 81.337,55.118 ; 69.272,59.483 76.972,59.483 78.797,57.658 81.337,57.658 ; 69.272,68.573 67.247,68.573 66.732,69.088 66.732,89.408 68.637,91.313 90.862,91.313 94.672,87.503 ; 69.272,71.073 71.732,71.073 73.082,69.723 73.082,65.913 76.257,62.738 81.337,62.738 ; 69.272,73.573 73.042,73.573 74.987,71.628 74.987,67.818 77.527,65.278 81.337,65.278 ; 69.272,76.073 74.352,76.073 77.527,72.898 81.337,72.898 ; 69.272,78.573 76.297,78.573 79.432,75.438 81.337,75.438 ; 69.927,87.838 69.927,84.348 69.272,83.693 69.272,81.073 74.272,81.073 v4(74.352,81.153) ; 72.427,87.838 75.287,87.838 76.892,86.233 76.892,81.788 78.162,80.518 81.337,80.518 ; 81.337,37.338 93.402,37.338 94.672,38.608 94.672,87.503 ; 97.847,100.838 95.942,100.838 88.322,93.218 67.367,93.218 64.827,90.678 64.827,40.513 65.857,39.483 ; 106.737,34.798 106.737,37.338 ; 106.737,39.878 115.627,39.878 ; 106.737,42.418 115.627,42.418 ; 106.737,44.958 115.627,44.958 ; 106.737,47.498 v3(109.912,47.498) ; 106.737,52.578 109.912,52.578 116.897,59.563 131.502,59.563 132.772,60.833 ; 106.737,65.278 108.372,65.278 110.407,63.243 110.407,60.123 ; 106.737,72.898 108.642,72.898 111.817,76.073 113.722,76.073 ; 106.737,75.438 108.642,75.438 111.817,78.613 113.722,78.613 ; 106.737,77.978 111.182,82.423 111.182,85.598 111.817,86.233 113.722,86.233 ; 106.737,80.518 109.277,83.058 109.277,86.868 111.182,88.773 113.722,88.773 ; 106.737,88.138 100.387,88.138 98.482,86.233 v3(98.482,83.693) 98.482,37.338 ; 107.372,50.038 110.547,50.038 118.167,57.658 139.757,57.658 141.027,58.928 141.027,60.833 ; 110.407,67.743 110.407,66.243 111.407,65.243 117.407,65.243 ; 112.907,60.123 114.787,60.123 115.907,61.243 120.407,61.243 121.907,62.743 121.907,63.243 ; 112.907,67.743 v5(112.907,72.243) ; 113.722,81.153 129.597,81.153 136.582,74.168 136.582,70.358 ; 115.527,34.798 v1(120.707,34.798) 125.787,34.798 ; 115.527,39.878 125.787,39.878 ; 115.527,42.418 125.787,42.418 ; 115.527,47.498 125.787,47.498 128.327,47.498 132.772,43.053 135.947,43.053 ; 115.627,34.798 111.182,34.798 108.642,32.258 66.097,32.258 64.827,33.528 64.827,38.453 65.857,39.483 ; 115.627,50.038 118.167,50.038 119.437,51.308 119.437,53.213 121.342,55.118 ; 117.407,62.703 117.867,62.703 120.907,65.743 121.907,65.743 ; 117.407,67.783 117.407,69.743 118.022,70.358 136.582,70.358 ; 118.167,100.52 115.945,100.52 108.007,92.583 99.752,92.583 94.672,87.503 ; v1(120.707,44.958) 125.787,44.958 ; 121.957,63.373 121.977,63.393 ; 125.787,50.038 131.502,50.038 ; 128.327,67.183 129.677,65.833 132.772,65.833 ; 131.502,39.878 132.772,38.608 135.947,38.608 139.122,38.608 141.027,40.513 ; 131.502,55.118 134.677,55.118 135.947,53.848 135.947,47.458 139.082,47.458 141.027,45.513 ; 132.772,63.333 136.542,63.333 136.582,63.373 ; 135.947,41.108 135.947,43.053 ; 135.947,44.958 135.947,43.053 ; 141.027,43.013 135.987,43.013 135.947,43.053 ; 98.482,37.338 100.387,37.338 104.197,37.338 115.527,37.338 125.787,37.338 128.962,37.338 132.137,34.163 142.297,34.163 144.837,36.703 144.837,62.738 144.202,63.373 144.162,63.333 141.027,63.333 136.622,63.333 136.582,63.373 ; 136.582,63.373 136.582,70.358
  B.Cu w1.5: 71.812,98.378 74.272,98.378 74.352,98.298 78.162,102.108 78.162,105.283 79.432,106.553 79.49,106.495 83.242,106.495 ; 71.812,103.378 71.812,109.728 ; 83.242,102.995 83.242,102.743 76.257,95.758 68.637,95.758 66.732,97.663 66.732,112.268 69.192,114.728 71.812,114.728 71.812,114.811 74.987,117.986 85.822,117.986 85.822,121.198 87.687,123.063 94.037,123.063 97.847,119.253 ; 90.822,117.986 90.822,106.573 91.497,105.898 ; 97.847,100.838 100.387,100.838 ; 113.722,83.693 121.342,83.693 123.247,85.598 ; 118.167,100.52 120.707,100.52 122.295,100.52 123.247,99.568 123.247,85.598 ; 141.027,65.833 141.027,74.168 131.502,83.693 125.152,83.693 123.247,85.598
  B.Cu w2: 83.242,102.995 91.094,102.995 91.497,103.398 ; 97.847,119.253 100.387,119.253 100.387,121.793 101.657,123.063 116.897,123.063 118.167,121.793 118.167,118.935 120.707,118.935
  Edge.Cuts w0.254: 63.557,25.908 63.557,124.968 cw(c64.827,124.968) 64.827,126.238 144.837,126.238 ; 109.15,1.905 ccw(c111.055,1.905) 111.055,0 189.795,0 ccw(c189.795,1.905) 191.7,1.905 ; 146.107,25.908 146.107,124.968 ; 144.837,126.238 cw(c144.837,124.968) 146.107,124.968 ; 144.837,126.238 cw(c144.837,124.968) 146.107,124.968
  other v1: 120.707,34.798 120.707,34.798
  other v2: 120.707,44.958 120.707,44.958

## Polygon pours and split planes (outlines as drawn)
no net on F.Cu "F.Cu--3" (solid, remove dead copper, pour order 30080): 110.329,49.113 109.622,49.82 109.558,49.757 109.412,49.403 108.955,47.788 109.912,47.492 110.869,47.788 110.412,49.403 110.266,49.049
no net on F.Cu "F.Cu--2" (solid, remove dead copper, pour order 30078): 97.425,85.457 96.718,84.75 97.6,83.222 98.486,83.689 98.953,84.575
no net on F.Cu "F.Cu--1" (solid, remove dead copper, pour order 30076): 111.622,83.665 112.329,82.958 112.357,83.193 112.57,83.073 113.723,83.693 112.57,84.313 112.357,84.193 112.003,84.047
no net on F.Cu "F.Cu-" (solid, remove dead copper, pour order 30075): 76.47,82.564 75.763,83.271 74.433,82.648 74.348,81.149 75.847,81.234
no net on B.Cu "B.Cu--36" (solid, remove dead copper, pour order 30086): 98.982,85.688 97.982,85.688 97.525,83.983 98.482,83.687 99.439,83.983
no net on B.Cu "B.Cu--35" (solid, remove dead copper, pour order 30088): 124.2,47.998 124.2,46.998 125.025,46.863 125.788,47.498 125.025,48.133
no net on B.Cu "B.Cu--34" (solid, remove dead copper, pour order 30083): 115.627,80.653 115.627,81.653 114.802,81.788 113.721,81.153 114.802,80.518
no net on B.Cu "B.Cu--33" (solid, remove dead copper, pour order 30099): 124.2,35.298 124.2,34.298 125.025,34.163 125.788,34.798 125.025,35.433
no net on B.Cu "B.Cu--32" (solid, remove dead copper, pour order 30107): 133.407,120.523 133.407,102.743 109.912,102.743 109.912,121.158 115.627,121.158 115.627,116.713 127.057,116.713 127.057,120.523
no net on B.Cu "B.Cu--31" (solid, remove dead copper, pour order 30082): 111.817,86.733 111.817,85.733 112.643,85.598 113.723,86.233 112.643,86.868
no net on B.Cu "B.Cu--30" (solid, remove dead copper, pour order 30067): 78.162,104.648 78.162,110.363 78.162,115.443 83.877,115.443 102.927,115.443 102.927,121.158 109.912,121.158 109.912,97.028 102.292,97.028 102.292,105.283
no net on B.Cu "B.Cu--29" (solid, remove dead copper, pour order 30084): 107.917,47.998 107.917,46.998 109.622,46.541 109.918,47.498 109.622,48.455
no net on B.Cu "B.Cu--28" (solid, remove dead copper, pour order 30092): 127.375,36.838 127.375,37.838 126.549,37.973 125.786,37.338 126.549,36.703
no net on B.Cu "B.Cu--27" (solid, remove dead copper, pour order 30085): 97.982,81.698 98.982,81.698 99.439,83.403 98.482,83.699 97.525,83.403
no net on B.Cu "B.Cu--26" (solid, remove dead copper, pour order 30101): 124.2,42.918 124.2,41.918 125.025,41.783 125.788,42.418 125.025,43.053
no net on B.Cu "B.Cu--25" (solid, remove dead copper, pour order 30079): 111.817,76.573 111.817,75.573 112.643,75.438 113.723,76.073 112.643,76.708
no net on B.Cu "B.Cu--24" (solid, remove dead copper, pour order 30097): 117.215,41.918 117.215,42.918 116.389,43.053 115.626,42.418 116.389,41.783
no net on B.Cu "B.Cu--23" (solid, remove dead copper, pour order 30100): 117.215,34.298 117.215,35.298 116.389,35.433 115.626,34.798 116.389,34.163
no net on B.Cu "B.Cu--22" (solid, remove dead copper, pour order 30091): 124.2,45.458 124.2,44.458 125.025,44.323 125.788,44.958 125.025,45.593
no net on B.Cu "B.Cu--21" (solid, remove dead copper, pour order 30093): 124.2,37.838 124.2,36.838 125.025,36.703 125.788,37.338 125.025,37.973
no net on B.Cu "B.Cu--20" (solid, remove dead copper, pour order 30068): 109.912,99.568 113.087,99.568 116.262,102.743 109.912,102.743
no net on B.Cu "B.Cu--19" (solid, remove dead copper, pour order 30081): 71.857,81.573 71.857,80.573 73.317,80.073 74.358,81.073 73.172,82.073
no net on B.Cu "B.Cu--18" (solid, remove dead copper, pour order 30096): 127.375,46.998 127.375,47.998 126.549,48.133 125.786,47.498 126.549,46.863
no net on B.Cu "B.Cu--17" (solid, remove dead copper, pour order 30077): 111.817,79.113 111.817,78.113 112.643,77.978 113.723,78.613 112.643,79.248
no net on B.Cu "B.Cu--16" (solid, remove dead copper, pour order 30090): 117.215,46.998 117.215,47.998 116.389,48.133 115.626,47.498 116.389,46.863
no net on B.Cu "B.Cu--15" (solid, remove dead copper, pour order 30074): 116.897,101.021 116.897,100.021 117.532,99.885 118.168,100.52 117.532,101.155
no net on B.Cu "B.Cu--14" (solid, remove dead copper, pour order 30087): 114.04,37.838 114.04,36.838 114.865,36.703 115.628,37.338 114.865,37.973
no net on B.Cu "B.Cu--13" (solid, remove dead copper, pour order 30089): 114.04,35.298 114.04,34.298 114.865,34.163 115.628,34.798 114.865,35.433
no net on B.Cu "B.Cu--12" (solid, remove dead copper, pour order 30071): 109.912,97.028 113.087,99.568 109.912,99.568
no net on B.Cu "B.Cu--11" (solid, remove dead copper, pour order 30104): 114.04,40.378 114.04,39.378 114.865,39.243 115.628,39.878 114.865,40.513
no net on B.Cu "B.Cu--10" (solid, remove dead copper, pour order 30102): 127.375,49.538 127.375,50.538 126.549,50.673 125.786,50.038 126.549,49.403
no net on B.Cu "B.Cu--9" (solid, remove dead copper, pour order 30106): 117.215,49.538 117.215,50.538 116.389,50.673 115.626,50.038 116.389,49.403
no net on B.Cu "B.Cu--8" (solid, remove dead copper, pour order 30105): 124.2,40.378 124.2,39.378 125.025,39.243 125.788,39.878 125.025,40.513
no net on B.Cu "B.Cu--7" (solid, remove dead copper, pour order 30073): 111.817,89.273 111.817,88.273 112.643,88.138 113.723,88.773 112.643,89.408
no net on B.Cu "B.Cu--6" (solid, remove dead copper, pour order 30095): 114.04,45.458 114.04,44.458 114.865,44.323 115.628,44.958 114.865,45.593
no net on B.Cu "B.Cu--5" (solid, remove dead copper, pour order 30070): 143.567,62.103 140.392,62.103 140.392,64.167 143.567,64.167
no net on B.Cu "B.Cu--4" (solid, remove dead copper, pour order 30069): 124.517,102.743 125.787,100.838 125.787,86.868 127.057,85.598 132.772,85.598 143.567,74.803 143.567,62.103 146.107,62.103 146.107,126.238 123.247,126.238 123.247,102.743
no net on B.Cu "B.Cu--3" (solid, remove dead copper, pour order 30072): 96.577,101.338 96.577,100.338 97.212,100.203 97.848,100.838 97.212,101.473
no net on B.Cu "B.Cu--2" (solid, remove dead copper, pour order 30094): 117.215,39.378 117.215,40.378 116.389,40.513 115.626,39.878 116.389,39.243
no net on B.Cu "B.Cu--1" (solid, remove dead copper, pour order 30098): 117.215,36.838 117.215,37.838 116.389,37.973 115.626,37.338 116.389,36.703
no net on B.Cu "B.Cu-" (solid, remove dead copper, pour order 30103): 114.04,42.918 114.04,41.918 114.865,41.783 115.628,42.418 114.865,43.053

## Other copper
B.Cu:
  text "Ver 1.1" at 119.437,28.033 h1.5
  text "VINYL-Player" at 135.647,27.783 h1.5
  text "(C) Andre Reichl 03/2026" at 181.24,0.462 h1.5
F.SilkS:
  text "Power Amp" at 84.412,123.566 h1
  text "Regler 3,3V" at 100.287,121.661 h1
  text "Regler 5V" at 121.242,121.661 h1
  text "GND 12V" at 91.397,112.303 h1
  text "Switch" at 66.086,110.263 h1 r90
  text "12V GND" at 77.492,103.913 h1 r90
  text "Power" at 66.062,98.833 h1 r90
  text "OTA" at 66.632,90.078 h1
  text "Lift-Motor" at 145.461,79.148 h1 r90
  text "Hall-IC" at 128.862,68.488 h1
  text "Taster-LED" at 125.752,60.733 h1 r90
  text "Bedienpanel" at 66.887,60.098 h1 r90
  text "LED-Ring" at 138.642,59.463 h1 r90
  text "Sig GND VCC" at 136.737,58.193 h1 r90
  text "Sig GND VCC" at 145.627,58.193 h1 r90
  text "Sig1 GND Sig2" at 145.627,37.238 h1 r90
  text "3V3" at 109.177,33.563 h1
  text "3V3" at 119.972,33.563 h1
  text "Amp" at 145.604,33.428 h1 r90
  text "USB-Buchsen" at 81.472,26.948 h2
  text "Ver: 1.1" at 129.497,26.578 h1
  text "VINYL-Player / (C) Andre Reichl 03/2026" at 108.407,25.43 h1

## Text inside footprints (layer, text, board x,y; h text height)
Q1: F.SilkS "C" at 116.483,61.851 h0.9 r90; F.SilkS "B" at 116.483,64.793 h0.9 r90; F.SilkS "E" at 116.483,67.735 h0.9 r90